# Altium PCB PCB1.PcbDoc
Units mil, origin at the board's own origin, x right, y up, seen from the top; angles counter-clockwise.
Board outline 1935 x 1660 mil, 2 copper layers (Top Layer, Bottom Layer); 22 components, 14 nets, 59 pads, 0 vias.
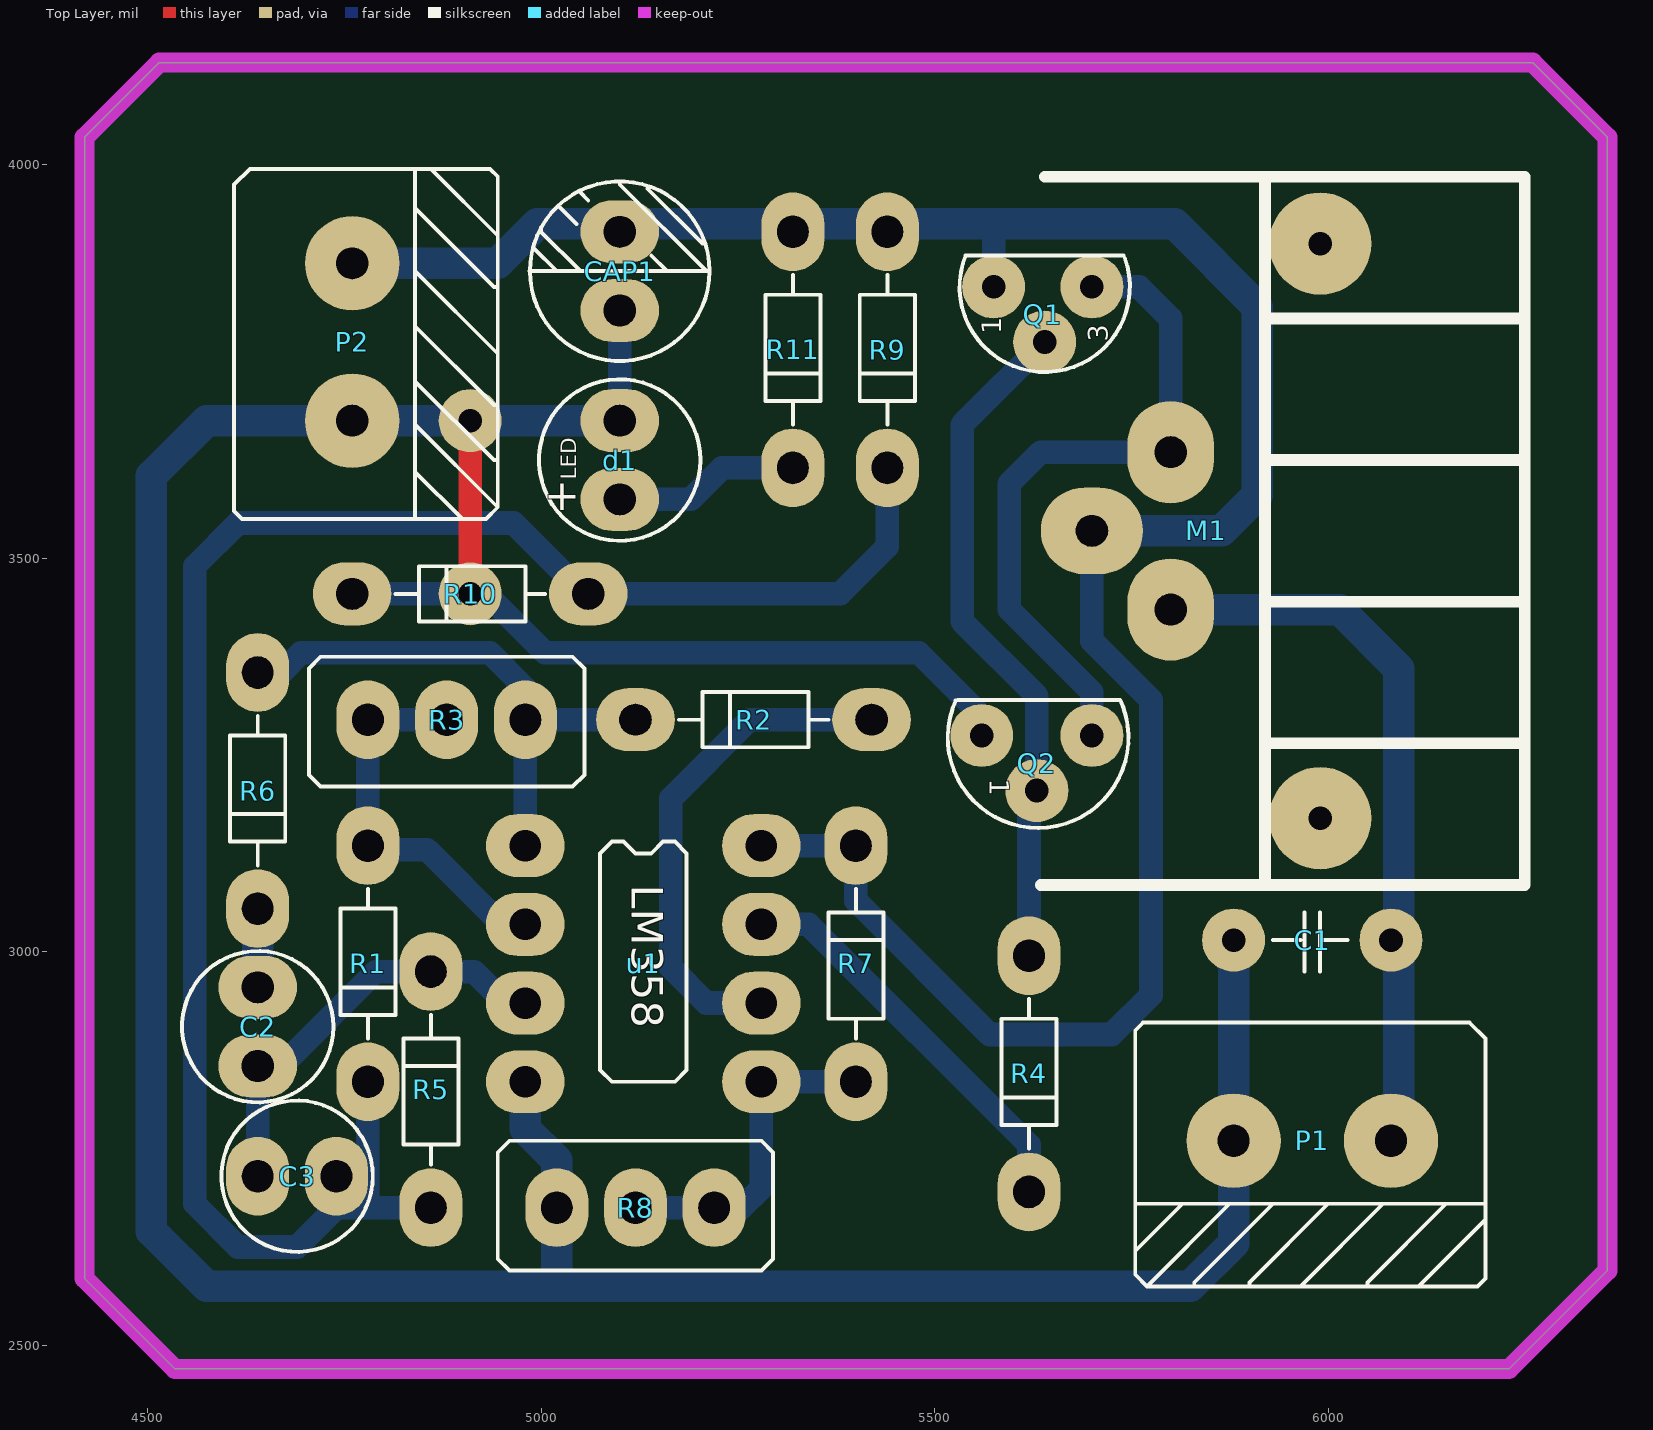
[diagram p0: Top Layer view]
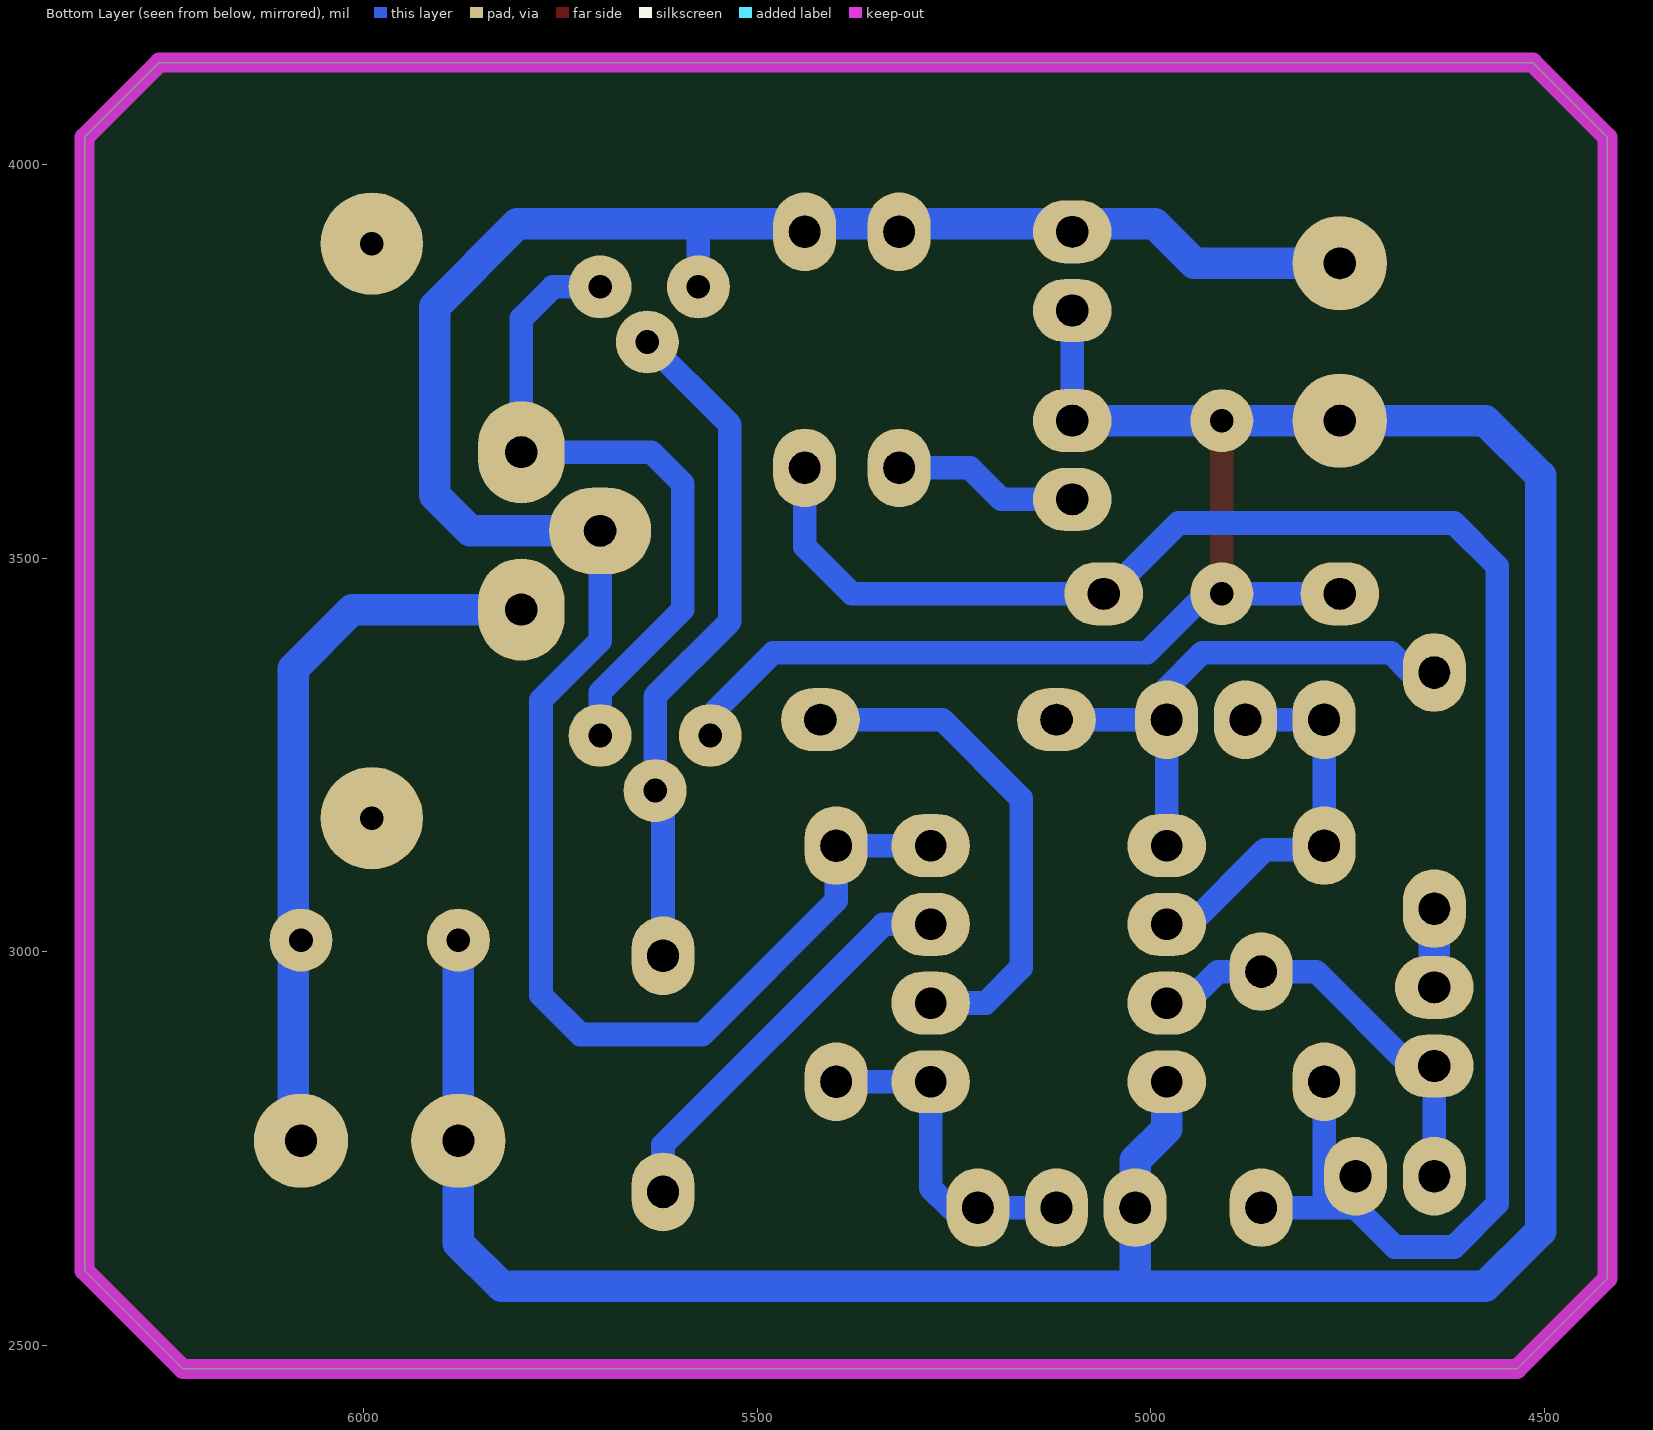
[diagram p1: Bottom Layer view, seen from below]

## Layer stack, top to bottom
Top Layer: signal copper 1.4
Dielectric: dielectric 12.6, FR-4, Dk 4.8
Bottom Layer: signal copper 1.4

## Board outline
4420,2585 4420,4035 4515,4130 6260,4130 6355,4035 6355,2595 6230,2470 4535,2470

## Design rules (kind name [scope] priority, off if disabled: settings)
Clearance [All] p1: gap=10
ComponentClearance [All] p1: gap=10 collisioncheckmode=3 verticalgap=10
PolygonConnect [All] p1: connectstyle=Relief reliefconductorwidth=10 reliefentries=4 polygonreliefangle="90 Angle"
RoomDefinition Sheet1 [InComponentClass('Sheet1')] p1: confinementstyle=ConfineIn formatcopy=TRUE lockcomponents=FALSE outline 0,0 2000,0 2000,1000 0,1000
RoutingVias [All] p1: holewidth=28 width=50 viastyle="Through Hole" minholewidth=28 minwidth=50 maxholewidth=28 maxwidth=50
SolderMaskExpansion [All] p1: expansion=4
TestPointUsage [All] p1: valid=0 allowmultiple=FALSE
Testpoint [All] p1: side=15 testpointundercomponent=TRUE minsize=40 maxsize=100 preferedsize=60 minholesize=0 maxholesize=40 preferedholesize=32 testpointgrid=1 style=1023 order=0-112345678
Width [All] p1: maxlimit=40 minlimit=40 preferedwidth=40
18 further rules are at their usual default settings.

## Components (designator, comment, footprint, x,y, rotation, side; value= is the part's Value field where it differs from the comment)
C1 "Cap" C 5880,3015 r0 top
C2 "Cap" Cap 4640,2855 r90 top
C3 "Cap" Cap 4640,2715 r0 top
CAP1 "电解小电容" 电解小电容 5100,3815 r90 top
d1 "LED" LED 5100,3575 r90 top
M1 "MOS" MOS1 5800,3635 r0 top
P1 "双孔压线器" 双孔压线器 6080,2760 r180 top
P2 "双孔压线器" 双孔压线器 4760,3875 r270 top
Q1 "NPN" "npn - duplicate" 5575,3845 r90 top
Q2 "PNP" "pnp - duplicate" 5700,3275 r270 top
R1 "电阻" 电阻 4780,3135 r270 top
R2 "电阻" 电阻 5420,3295 r180 top
R3 "滑动变阻器" 滑动变阻器 4980,3295 r180 top
R4 "电阻" 电阻 5620,2995 r270 top
R5 "电阻" 电阻 4860,2675 r90 top
R6 "电阻" 电阻 4640,3355 r270 top
R7 "电阻" 电阻 5400,2835 r90 top
R8 "滑动变阻器" 滑动变阻器 5020,2675 r0 top
R9 "电阻" 电阻 5440,3915 r270 top
R10 "电阻" 电阻 5060,3455 r180 top
R11 "电阻" 电阻 5320,3915 r270 top
u1 "LM358" LM358 4980,3135 r0 top

## Footprints (in the part's own frame and the unit in brackets; to place one, negate y for a bottom-side part, rotate by r counter-clockwise, add the part's x,y. Pads: shape width x height; smd on the part's side, far side on the other; paste and mask are expansions set on the pad)
C [mil]
  round 80 hole 30: 1(0,0) 2(200,0)
  silkscreen extent 50,-40 145,35
Cap [mil]
  oval 80x100 hole 40 slot 41 at 90 deg: 1(0,0) 2(100,0)
  silkscreen extent -46,-96 146,96
LED [mil]
  oval 80x100 hole 40 slot 41 at 90 deg: 1(0,0) 2(100,0)
  silkscreen extent -53,-103 153,102
LM358 [mil]
  oval 100x80 hole 40: 1(0,0) 2(0,-100) 3(0,-200) 4(0,-300) 5(300,-300) 6(300,-200) 7(300,-100) 8(300,0)
  silkscreen extent 95,-300 205,5
MOS1 [mil]
  oval 130x110 hole 40 slot 41 at 0 deg: 1(-100,-100)
  oval 110x130 hole 40 slot 41 at 0 deg: 2(0,0) 3(0,-200)
  round 130 hole 30: " "(190,-465) " "(190,265)
  silkscreen extent -165,-555 450,350
"npn - duplicate" [mil]
  round 80 hole 30: 1(0,0) 2(-70,-65) 3(0,-125)
  silkscreen extent -108,-173 40,43
"pnp - duplicate" [mil]
  round 80 hole 30: 1(0,-140) 2(70,-70) 3(0,0)
  silkscreen extent -45,-183 117,46
双孔压线器 [mil]
  round 120 hole 40 slot 41 at 90 deg: 0(0,0) 1(200,0)
  silkscreen extent -120,-150 325,185
滑动变阻器 [mil]
  oval 80x100 hole 40 slot 41 at 90 deg: 1(0,0) 2(200,0) 3(100,0)
  silkscreen extent -75,-80 275,85
电解小电容 [mil]
  oval 80x100 hole 40 slot 41 at 90 deg: 1(0,0) 2(100,0)
  silkscreen extent -64,-114 164,115
电阻 [mil]
  oval 100x80 hole 40 slot 41 at 0 deg: 1(300,0) 2(0,0)
  silkscreen extent 55,-35 245,35

## Part data
R8: library part 电阻

## Free pads (board coordinates)
  round 80 hole 30: 0(4910,3455) 1(4910,3675)

## Nets (pads, with @x,y where several pads share a name; then routed paths per layer and width w, separated by ;. In a path a pad name is that pad's centre, name@x,y a point inside that pad or via, vN(x,y) a via of type N, cw(c..) or ccw(c..) an arc to the next point about the centre after c; other vN are vias at no path point)
+12: CAP1.2 M1.1 P2.0 Q1.1 R7.1 R9.2 R11.2 u1.8 | length 3025
  Bottom Layer w30: u1.8 R7.1 5400,3065 5570,2895 5725,2895 5775,2945 5775,3320 5700,3395 M1.1 M1.1@5740,3535 ; Q1.1 5575,3910
  Bottom Layer w40: P2.0 4945,3875 4995,3925 5805,3925 5910,3820 5910,3580 5865,3535 M1.1@5740,3535
GND: C1.1 CAP1.1 d1.2 P1.1 P2.1 pad.0 pad.1 Q2.1 R8.1 R10.1 u1.4 | length 4909.8
  Top Layer w30: pad.0@4910,3475 pad.1
  Bottom Layer w30: R10.1 pad.0 ; pad.0@4910,3475 5005,3380 5480,3380 5560,3300 Q2.1 ; d1.2@5080,3675 d1.2 CAP1.1
  Bottom Layer w40: u1.4 4980,2775 5020,2735 5020,2575 ; d1.2@5080,3675 4575,3675 4505,3605 4505,2645 4575,2575 5825,2575 5880,2630 C1.1
NetC1_2: C1.2 M1.3 P1.0 | length 890.2
  Bottom Layer w40: M1.3 6015,3435 6090,3360 6090,2805 P1.0@6080,2795
NetC2_1: C2.1 C3.1 R5.1 u1.3 | length 541.3
  Bottom Layer w30: C3.1@4640,2695 C2.1 4670,2855 4790,2975 4915,2975 u1.3@4955,2935
NetC2_2: C2.2 R6.1 | length 100
  Bottom Layer w40: C2.2 R6.1
Netd1_1: d1.1 R11.1 | length 236.6
  Bottom Layer w30: d1.1 5190,3575 5230,3615 R11.1
NetM1_2: M1.2 Q1.3 Q2.3 | length 856.6
  Bottom Layer w30: Q2.3 5700,3330 5595,3435 5595,3595 5635,3635 M1.2 ; Q1.3 5760,3845 5800,3805 M1.2@5800,3650
NetQ1_2: Q1.2 Q2.2 R4.2 | length 827.8
  Bottom Layer w30: R4.2 Q2.2@5620,3190 ; Q2.2@5630,3225 5630,3325 5535,3420 5535,3670 Q1.2
NetR1_2: R1.2 R3.2 R3.3 u1.2 | length 489.4
  Bottom Layer w30: R1.2 R3.2 R3.3 ; R1.2@4790,3130 4855,3130 4950,3035 u1.2
NetR2_1: R2.1 R3.1 R6.2 u1.1 | length 709
  Bottom Layer w30: R6.2 4670,3355 4695,3380 4935,3380 4980,3335 u1.1 ; R3.1 R2.1
NetR2_2: R2.2 u1.6 | length 645.1
  Bottom Layer w30: u1.6 5210,2935 5165,2980 5165,3195 5265,3295 R2.2
NetR4_1: R4.1 u1.7 | length 506
  Bottom Layer w30: u1.7@5290,3035 5340,3035 5620,2755 R4.1
NetR7_2: R7.2 R8.2 R8.3 u1.5 | length 425.4
  Bottom Layer w30: R8.3 5255,2675 5280,2700 u1.5 R7.2
VCC: C3.2 R1.1 R5.2 R9.1 R10.2 | length 2354.3
  Bottom Layer w30: 4780,2680 R1.1 ; R5.2 4740,2675 4690,2625 4615,2625 4560,2680 4560,3490 4615,3545 4965,3545 R10.2@5045,3465 ; R10.2 5380,3455 5440,3515 R9.1
pads on no net: "M1. "

## Keep-outs
Keep-Out Layer:
  the board outline again, w25

## Text inside footprints (layer, text, board x,y; h text height)
d1: Top Overlay "+" at 5050,3595 h40 r180
Q1: Top Overlay "3" at 5720,3775 h25 r90; Top Overlay "1" at 5585,3785 h25 r90
Q2: Top Overlay "1" at 5570,3220 h25 r270